# EAGLE board schematic_batman (EAGLE 8.1.0)
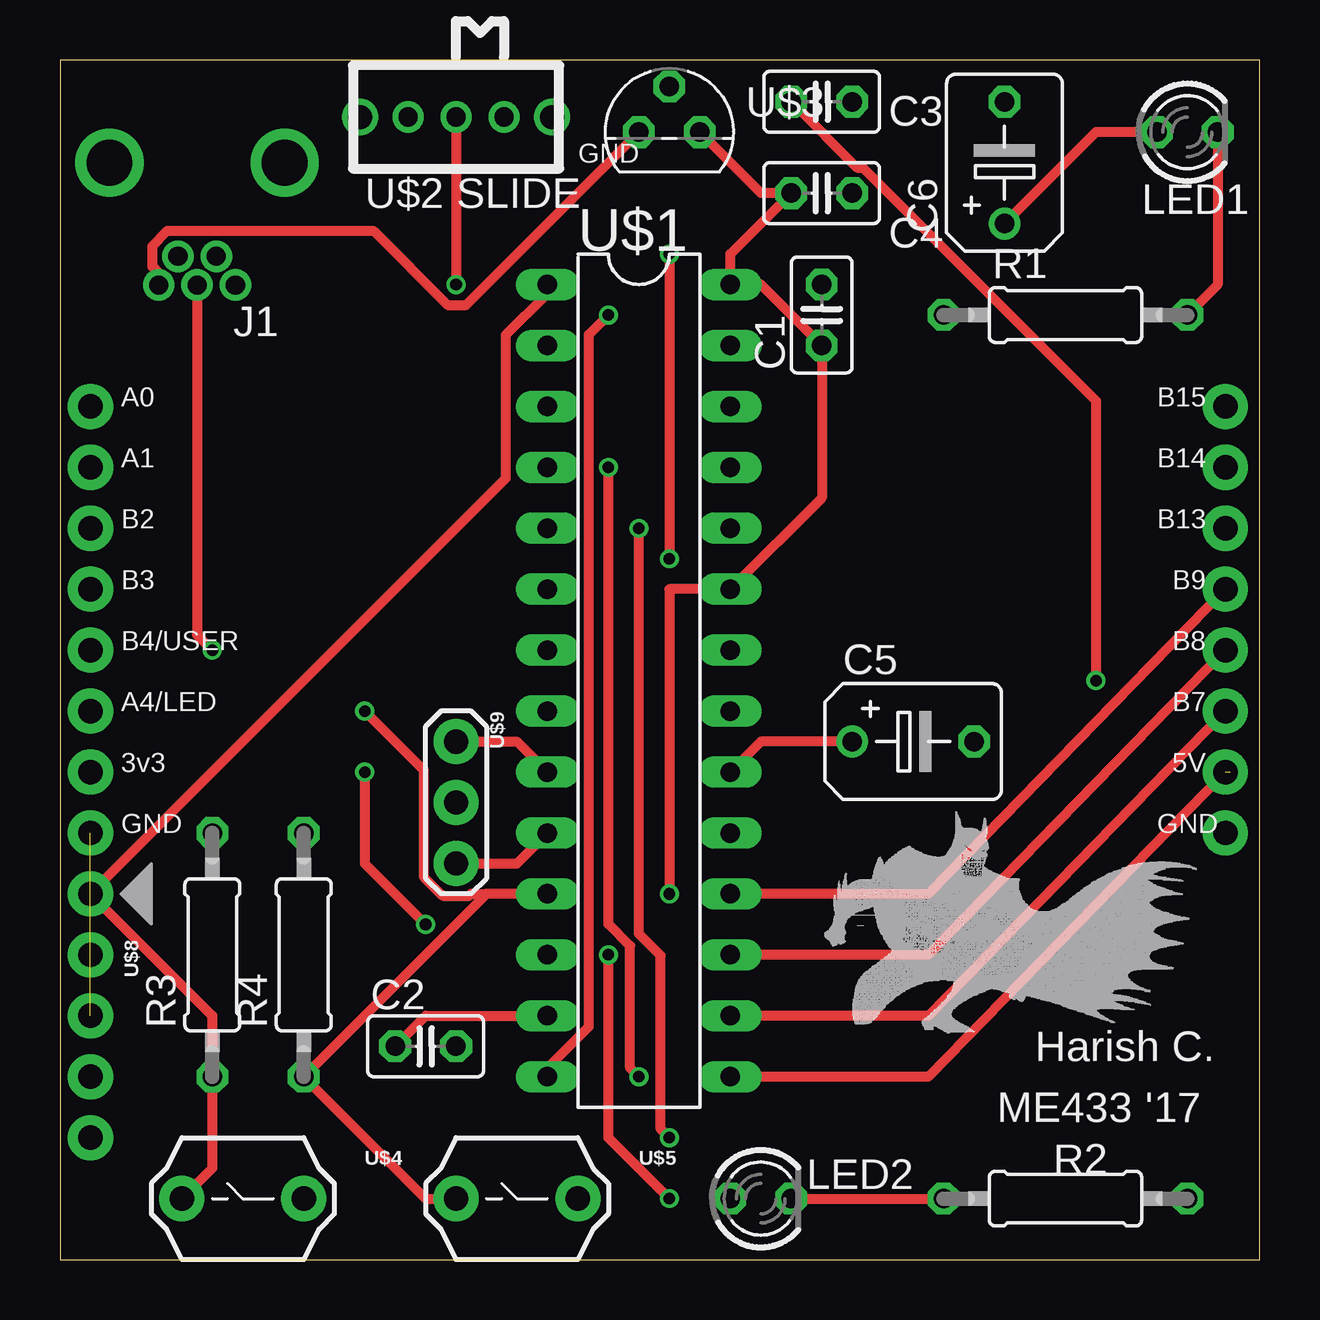
[diagram p0: board, top side]
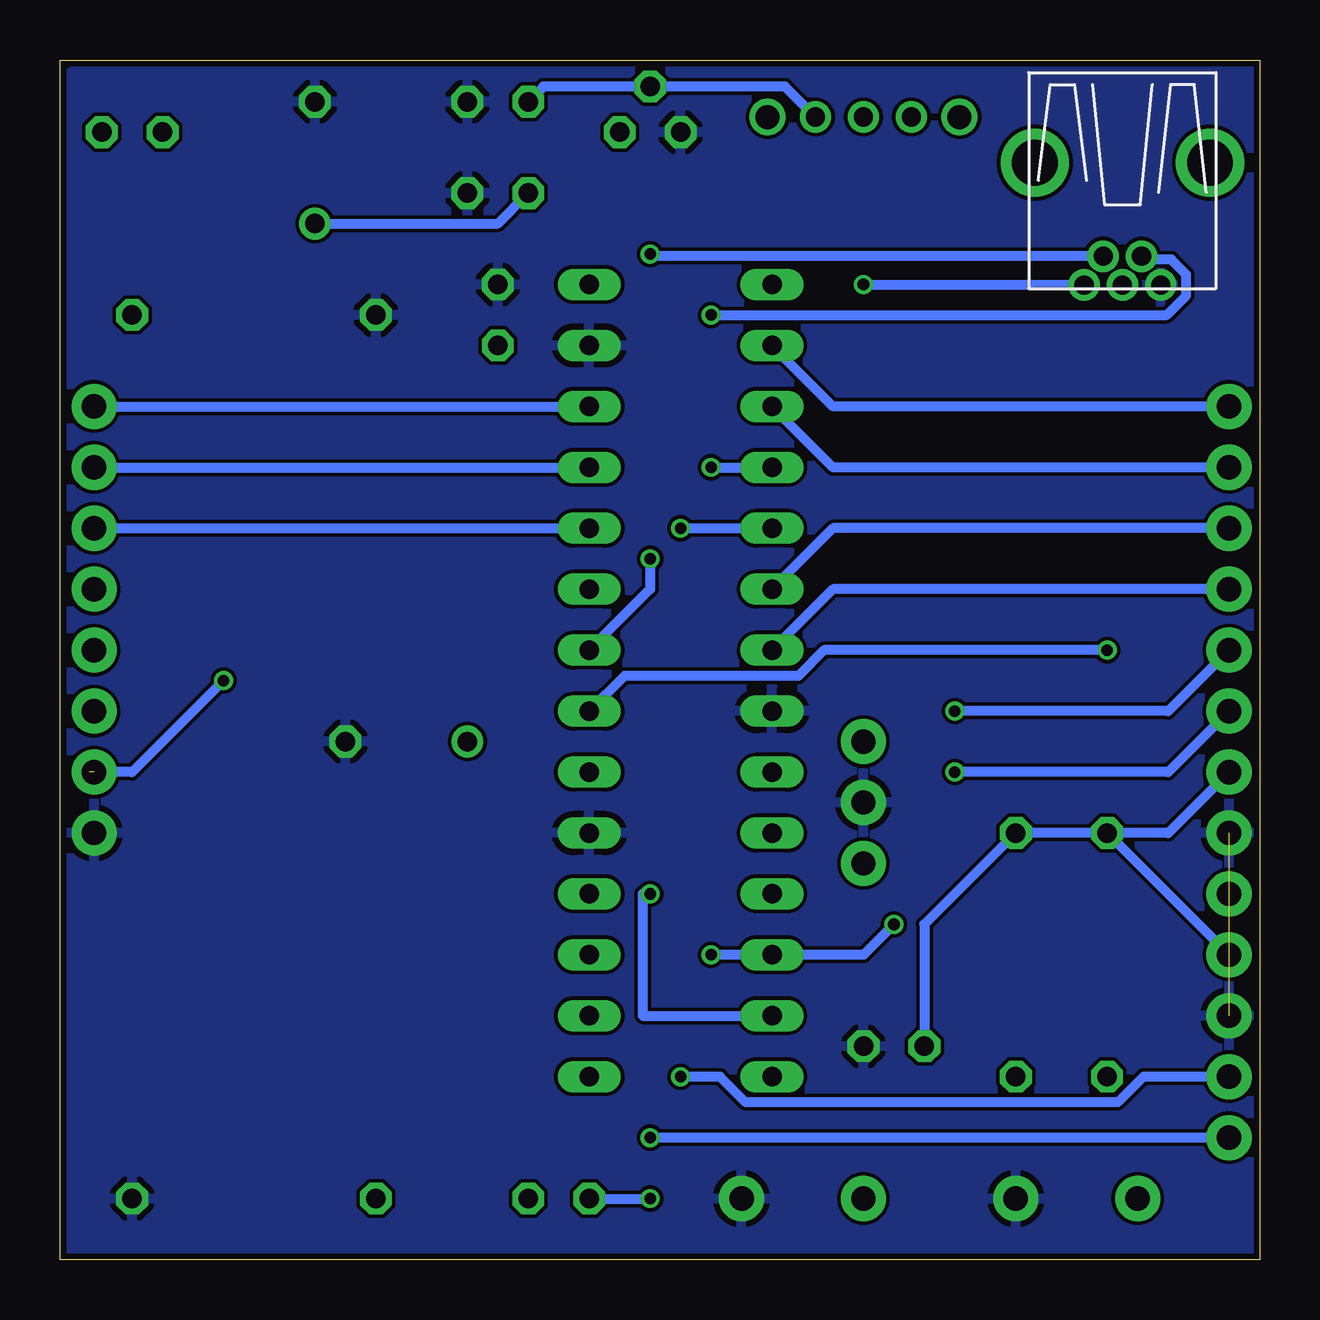
[diagram p1: board, bottom side, seen from below]

Size 50 x 50 mm. Coordinates in mm from the lower left corner, seen from the top.
Outline: 0,0 50,0 50,50 0,50 0,0
Copper layers (1*16): Top 0.035mm / dielectric 1.5mm / Bottom 0.035mm
Design rules "SeeedStudio_2layer_DRU_no_angle_20140221": minimum track width 6mil, minimum drill 12mil, track to track 6mil, track to pad 6mil, pad to pad 6mil, via to via 6mil, smd to smd 0mil, copper to edge 10mil, drill to drill 10mil, minimum pad ring 10mil, minimum via ring 6mil, stop-mask expansion 2mil, vias tented up to drill 100mil, thermal gap 10mil

## Footprints (pad centres in the part's own frame; a part is rotated, then mirrored left to right if it is on the bottom)
C025-025X050 = drill 0.813 octagon: 1 -1.27,0; 2 1.27,0
B45181B = drill 0.813: + -2.54,0 | drill 0.813 octagon: - 2.54,0
USB-MB-H = drill 0.8: D+ 5.1,0; D- 3.9,0.8; GND 5.1,-1.6; ID 3.9,-0.8; VBUS 5.1,1.6 | drill 1.9: P$6 0,-3.65; P$7 0,3.65
LED3MM = drill 0.813 octagon: A -1.27,0; K 1.27,0
0207/10 = drill 0.813 octagon: 1 -5.08,0; 2 5.08,0
DIL28-3 = drill 0.813 long: 1 -16.51,-3.81; 2 -13.97,-3.81; 3 -11.43,-3.81; 4 -8.89,-3.81; 5 -6.35,-3.81; 6 -3.81,-3.81; 7 -1.27,-3.81; 8 1.27,-3.81; 9 3.81,-3.81; 10 6.35,-3.81; 11 8.89,-3.81; 12 11.43,-3.81; 13 13.97,-3.81; 14 16.51,-3.81; 15 16.51,3.81; 16 13.97,3.81; 17 11.43,3.81; 18 8.89,3.81; 19 6.35,3.81; 20 3.81,3.81; 21 1.27,3.81; 22 -1.27,3.81; 23 -3.81,3.81; 24 -6.35,3.81; 25 -8.89,3.81; 26 -11.43,3.81; 27 -13.97,3.81; 28 -16.51,3.81
SLIDE = drill 0.8: 1 -2,0; 2 0,0; 3 2,0 | drill 1: P$1 -4,0; P$2 4,0
TO92 = drill 0.813 octagon: 1 -1.27,0; 2 0,1.905; 3 1.27,0
PB = drill 1.016 pad 1.88: 1 -2.54,0; 2 2.54,0
1X08 = drill 1.016 pad 1.88: 1 0,0; 2 2.54,0; 3 5.08,0; 4 7.62,0; 5 10.16,0; 6 12.7,0; 7 15.24,0; 8 17.78,0
1X05 = drill 1.016 pad 1.88: 1 0,0; 2 2.54,0; 3 5.08,0; 4 7.62,0; 5 10.16,0
OSC = drill 1.016 pad 1.88: 1 -2.54,0; 2 0,0; 3 2.54,0

## Placement (x,y rotation side)
C1  0.1uf  [C025-025X050]  31.75,39.37 90 top
C2  0.1uf  [C025-025X050]  15.24,8.89 0 top
C3  0.1uf  [C025-025X050]  31.75,48.26 0 top
C4  0.1uf  [C025-025X050]  31.75,44.45 0 top
C5  10uf  [B45181B]  35.56,21.59 0 top
C6  10uf  [B45181B]  39.37,45.72 90 top
J1  USB-MB-H  [USB-MB-H]  5.71,45.72 270 top
LED1  RED  [LED3MM]  46.99,46.99 0 top
LED2  GREEN  [LED3MM]  29.21,2.54 0 top
R1  330  [0207/10]  41.91,39.37 0 top
R2  330  [0207/10]  41.91,2.54 180 top
R3  10k  [0207/10]  6.35,12.7 90 top
R4  10k  [0207/10]  10.16,12.7 90 top
U$1  PIC32MX250F128B  [DIL28-3]  24.13,24.13 270 top
U$2  SLIDE  [SLIDE]  16.51,47.62 0 top
U$3  MCP1702  [TO92]  25.4,46.99 0 top
U$4  RESET  [PB]  7.62,2.54 0 top
U$5  USER  [PB]  19.05,2.54 0 top
U$6  CONN_08  [1X08]  48.58,17.78 90 top
U$7  CONN_08  [1X08]  1.27,17.78 90 top
U$8  PICKIT  [1X05]  1.27,15.24 270 top
U$9  8MHz  [OSC]  16.51,19.05 270 top

## Library data of the parts
C1-C6 R1-R4 = resistor
J1 U$1-U$9 = schematic_library
LED1 LED2 = led

## Nets
+3V3: C1.1 C2.1 C4.1 C6.+ LED1.A R3.2 R4.2 U$1.13 U$1.23 U$1.28 U$3.3 U$7.2 U$8.2
+5V: C3.1 U$1.15 U$2.3 U$3.2 U$6.2
A0: U$1.2 U$7.8
A1: U$1.3 U$7.7
A4/LED: LED2.A U$1.12 U$7.3
B2: U$1.6 U$7.6
B3: U$1.7 U$7.5
B4/USER: R4.1 U$1.11 U$5.1 U$7.4
B7: U$1.16 U$6.3
B8: U$1.17 U$6.4
B9: U$1.18 U$6.5
B13: U$1.24 U$6.6
B14: U$1.25 U$6.7
B15: U$1.26 U$6.8
D+: J1.D+ U$1.21
D-: J1.D- U$1.22
GND: C1.2 C2.2 C3.2 C4.2 C5.- C6.- J1.GND R1.1 R2.1 U$1.8 U$1.19 U$1.27 U$3.1 U$4.2 U$5.2 U$6.1 U$7.1 U$8.3 U$9.2
MCLR: R3.1 U$1.1 U$4.1 U$8.1
N$1: J1.VBUS U$2.2
N$2: C5.+ U$1.20
N$3: U$1.10 U$9.3
N$4: LED1.K R1.2
N$5: LED2.K R2.2
N$6: U$1.9 U$9.1
PGC: U$1.5 U$8.5
PGD: U$1.4 U$8.4
USBID: J1.ID U$1.14

## Tracks (layer width: path | path; a pad name or v marks a point on that pad's centre or on a via)
+3V3  (via drill 0.48)
  Top 0.406: LED1.A 43.18,46.99 C6.+ | U$3.3 29.21,44.45 C4.1 27.94,41.91 U$1.28 29.21,40.64 C1.1 31.75,31.75 U$1.23 25.4,27.94 v25.4,15.24 | C2.1 15.24,10.16 U$1.13
  Bottom 0.406: C6.+ 31.75,43.18 C4.1 | U$8.2 R3.2 | U$7.2 3.81,17.78 R3.2 | R3.2 R4.2 13.97,13.97 C2.1 | v25.4,15.24 25.72,15.24 25.72,10.16 U$1.13
+5V  (via drill 0.48)  (1 unrouted)
  Top 0.406: U$6.2 36.2,7.62 U$1.15 | C3.1 33.22,45.52 33.46,45.52 43.18,35.8 v43.18,24.13
  Bottom 0.406: U$2.3 19.78,48.9 U$3.2 29.84,48.9 C3.1 | v43.18,24.13 46.99,20.32 48.78,20.32
A0
  Bottom 0.406: U$7.8 17.78,35.56 U$1.2
A1
  Bottom 0.406: U$7.7 17.78,33.02 U$1.3
A4/LED  (via drill 0.48)
  Top 0.406: v25.4,2.54 22.86,5.08 v22.86,12.7 | v12.7,20.32 12.7,16.51 v15.24,13.97
  Bottom 0.406: LED2.A v25.4,2.54 | v22.86,12.7 U$1.12 16.51,12.7 v15.24,13.97 | U$7.3 3.81,20.32 v12.7,20.32
B2
  Bottom 0.406: U$7.6 17.78,30.48 U$1.6
B3
  Bottom 0.406: U$7.5 17.78,27.94 U$1.7
B4/USER  (via drill 0.48)
  Top 0.406: U$5.1 15.24,2.54 R4.1 17.78,15.24 | U$1.11 17.78,15.24 | v12.7,22.86 15.16,20.4 15.16,15.95 15.95,15.16 17.07,15.16 17.14,15.24 17.78,15.24
  Bottom 0.406: U$7.4 3.81,22.86 v12.7,22.86
B7
  Top 0.406: U$6.3 36.2,10.16 U$1.16
B8
  Top 0.406: U$6.4 36.2,12.7 U$1.17
B9
  Top 0.406: U$6.5 36.2,15.24 U$1.18
B13
  Bottom 0.406: U$6.6 U$1.24
B14
  Bottom 0.406: U$6.7 U$1.25
B15
  Bottom 0.406: U$6.8 U$1.26
D+  (via drill 0.48)
  Top 0.406: J1.D+ 5.71,26.04 v6.35,25.4
  Bottom 0.406: v6.35,25.4 18.15,25.4 19.22,24.33 26.47,24.33 U$1.21
D-  (via drill 0.48)
  Top 0.406: v25.4,41.91 v25.4,29.21
  Bottom 0.406: J1.D- 25.4,41.82 v25.4,41.91 | v25.4,29.21 25.4,27.94 U$1.22
GND  (1 unrouted)
  Top 0.406: U$3.1 16.93,39.79 16.16,39.79 13.07,42.88 4.48,42.88 3.85,42.26 3.85,41.38 4.12,41.12 J1.GND
  pour Bottom (isolate 0.012): 0,49.53 49.53,49.53 49.53,0 0,0
MCLR
  Top 0.406: U$4.1 6.35,3.81 R3.1 6.35,10.16 U$8.1 18.59,32.56 18.59,38.54 20.32,40.27 U$1.1
N$1  (via drill 0.48)
  Top 0.406: U$2.2 v16.51,40.64
  Bottom 0.406: v16.51,40.64 7.33,40.64 J1.VBUS
N$2
  Top 0.406: C5.+ 29.21,21.59 U$1.20
N$3
  Top 0.406: U$9.3 19.05,16.51 U$1.10
N$4
  Top 0.406: LED1.K 48.26,40.64 R1.2
N$5
  Top 0.406: LED2.K R2.2
N$6
  Top 0.406: U$9.1 19.05,21.59 U$1.9
PGC  (via drill 0.48)
  Top 0.406: v24.13,30.48 24.13,13.58 25.04,12.67 25.04,5.44 v25.4,5.08
  Bottom 0.406: U$8.5 v25.4,5.08 | v24.13,30.48 U$1.5
PGD  (via drill 0.48)
  Top 0.406: v22.86,33.02 22.86,13.99 23.77,13.08 23.77,7.98 v24.13,7.62
  Bottom 0.406: U$8.4 4.84,7.62 5.91,6.55 21.42,6.55 22.49,7.62 v24.13,7.62 | v22.86,33.02 U$1.4
USBID  (via drill 0.48)
  Top 0.406: U$1.14 20.32,7.99 22.05,9.72 22.05,38.56 v22.86,39.37
  Bottom 0.406: v22.86,39.37 3.87,39.37 3.06,40.18 3.06,41.06 3.68,41.68 4.78,41.68 J1.ID

## Text on the board
tPlace: GND | A0 | B15 | A1 | B14 | B2 | B13 | B3 | B9 | B4/USER | B8 | A4/LED | B7 | 3v3 | 5V | GND | GND | Harish C. | ME433 '17